# EAGLE board ATtiny85_Learn2 (EAGLE 6.5.0)

Size 100 x 80 mm. Coordinates in mm from the lower left corner, seen from the top.
Outline: 0,0 100,0 100,80 0,80 0,0
Copper layers (1*16): Top 0.035mm / dielectric 1.5mm / Bottom 0.035mm
Design rules "default": minimum track width 10mil, minimum drill 24mil, track to track 8mil, track to pad 8mil, pad to pad 8mil, via to via 8mil, smd to smd 8mil, copper to edge 40mil, drill to drill 8mil, minimum pad ring 10mil, minimum via ring 8mil, stop-mask expansion 4mil, vias tented up to drill 0mil, thermal gap 10mil

## Footprints (pad centres in the part's own frame; a part is rotated, then mirrored left to right if it is on the bottom)
C025-024X044 = drill 0.813 pad 1.422 octagon: 1 -1.27,0; 2 1.27,0
LED_BARGAPH_10 = drill 0.813 long: 1 -11.43,-3.81; 2 -8.89,-3.81; 3 -6.35,-3.81; 4 -3.81,-3.81; 5 -1.27,-3.81; 6 1.27,-3.81; 7 3.81,-3.81; 8 6.35,-3.81; 9 8.89,-3.81; 10 11.43,-3.81; 11 11.43,3.81; 12 8.89,3.81; 13 6.35,3.81; 14 3.81,3.81; 15 1.27,3.81; 16 -1.27,3.81; 17 -3.81,3.81; 18 -6.35,3.81; 19 -8.89,3.81; 20 -11.43,3.81
DIL18 = drill 0.813 long: 1 -10.16,-3.81; 2 -7.62,-3.81; 3 -5.08,-3.81; 4 -2.54,-3.81; 5 0,-3.81; 6 2.54,-3.81; 7 5.08,-3.81; 8 7.62,-3.81; 9 10.16,-3.81; 10 10.16,3.81; 11 7.62,3.81; 12 5.08,3.81; 13 2.54,3.81; 14 0,3.81; 15 -2.54,3.81; 16 -5.08,3.81; 17 -7.62,3.81; 18 -10.16,3.81
AVRISP = drill 0.9 pad 1.626: 1 -1.27,2.54; 2 1.27,2.54; 3 -1.27,0; 4 1.27,0; 5 -1.27,-2.54; 6 1.27,-2.54
1X02_LOCK = drill 1.016 pad 1.88: 1 -0.178,0; 2 2.718,0
LED5MM = drill 0.813 pad 1.676 octagon: A -1.27,0; K 1.27,0
0204/7 = drill 0.813 pad 1.676 octagon: 1 -3.81,0; 2 3.81,0
0204V = drill 0.813 octagon: 1 -1.27,0; 2 1.27,0
0603-ARV = smd 0.5 x 0.65: 1 -1.2,-0.625; 2 -0.4,-0.625; 3 0.4,-0.625; 4 1.2,-0.625; 5 1.2,0.625; 6 0.4,0.625; 7 -0.4,0.625; 8 -1.2,0.625
SO08-EIAJ = smd 0.61 x 2.21: 1 -1.905,-3.378; 2 -0.635,-3.378; 3 0.635,-3.378; 4 1.905,-3.378; 5 1.905,3.353; 6 0.635,3.353; 7 -0.635,3.353; 8 -1.905,3.353
DS1820 = drill 0.8: DQ 2.54,-1.27; GND 0.635,-1.27; VDD 4.445,-1.27

## Placement (x,y rotation side)
C1  0.1uF  [C025-024X044]  -38.1,29.21 0 top  (outside the outline)
D1  [LED_BARGAPH_10]  -26.67,19.05 0 top  (outside the outline)
IC1  MCP2300X/P  [DIL18]  -25.4,6.35 0 top  (outside the outline)
ISP1  AVRISP-6  [AVRISP]  -16.51,29.21 0 top  (outside the outline)
JP1  [1X02_LOCK]  -34.29,35.56 0 top  (outside the outline)
JP2  [1X02_LOCK]  -40.64,35.56 0 top  (outside the outline)
LED1  [LED5MM]  -30.48,29.21 0 top  (outside the outline)
R1  10K  [0204/7]  -22.86,43.18 0 top  (outside the outline)
R2  4K7  [0204V]  -43.18,27.94 0 top  (outside the outline)
R3  220  [0204/7]  -33.02,43.18 0 top  (outside the outline)
R4  4K7  [0204/7]  -43.18,43.18 0 top  (outside the outline)
R5  4K7  [0204V]  -15.24,38.1 0 top  (outside the outline)
R6  1K  [0204V]  -20.32,38.1 0 top  (outside the outline)
R13  [0603-ARV]  -44.45,38.1 0 top  (outside the outline)
R14  [0603-ARV]  -15.24,44.45 0 top  (outside the outline)
U$1  ATtiny85  [SO08-EIAJ]  -41.91,17.78 0 top  (outside the outline)
U$2  DS1820TO92  [DS1820]  -29.21,36.83 0 top  (outside the outline)

## Library data of the parts
C1 IC1 ISP1 LED1 R1-R6 = adafruit
D1 = SparkFun-LED
JP1 JP2 = SparkFun-Connectors
R13 R14 = SparkFun-Passives
U$1 = SparkFun-DigitalIC
U$2 = Ava

## Nets
GND: C1.2 D1.13 D1.14 D1.15 D1.16 D1.17 D1.18 D1.19 D1.20 IC1.3 IC1.4 IC1.5 IC1.9 ISP1.6 R3.1 U$1.4 U$2.GND
N$1: ISP1.5 R1.2 U$1.1
N$2: ISP1.4 JP2.1 U$1.5
N$3: ISP1.1 U$1.6
N$4: LED1.A U$1.2
N$6: R4.1 U$1.3 U$2.DQ
N$7: LED1.K R3.2
N$8: IC1.18 R2.2 R5.2 R6.2
N$9: IC1.2 JP1.2 R5.1
N$11: IC1.10 R13.1
N$12: IC1.11 R13.2
N$13: IC1.12 R13.3
N$14: IC1.13 R13.4
N$15: IC1.14 R14.1
N$16: IC1.15 R14.2
N$17: IC1.16 R14.3
N$18: IC1.17 R14.4
N$19: D1.1 R13.8
N$20: D1.2 R13.7
N$21: D1.3 R13.6
N$22: D1.4 R13.5
N$23: D1.5 R14.8
N$24: D1.6 R14.7
N$25: D1.7 R14.6
N$26: D1.8 R14.5
N$27: IC1.6 R6.1
SCL: IC1.1 ISP1.3 JP1.1 JP2.2 R2.1 U$1.7
VCC: C1.1 ISP1.2 R1.1 R4.2 U$1.8 U$2.VDD

## Tracks (layer width: path | path; a pad name or v marks a point on that pad's centre or on a via)
GND  (16 unrouted)
N$1  (2 unrouted)
N$2  (2 unrouted)
N$3  (1 unrouted)
N$4  (1 unrouted)
N$6  (2 unrouted)
N$7  (1 unrouted)
N$8  (3 unrouted)
N$9  (2 unrouted)
N$11  (1 unrouted)
N$12  (1 unrouted)
N$13  (1 unrouted)
N$14  (1 unrouted)
N$15  (1 unrouted)
N$16  (1 unrouted)
N$17  (1 unrouted)
N$18  (1 unrouted)
N$19  (1 unrouted)
N$20  (1 unrouted)
N$21  (1 unrouted)
N$22  (1 unrouted)
N$23  (1 unrouted)
N$24  (1 unrouted)
N$25  (1 unrouted)
N$26  (1 unrouted)
N$27  (1 unrouted)
SCL  (5 unrouted)
VCC  (5 unrouted)